# Altium PCB Copy of SoM.PcbDoc (part 3 of 8)
Units mm, origin at the board's own origin, x right, y up, seen from the top; angles counter-clockwise.
Board outline 69.6 x 50 mm, 10 copper layers ([1] Signal HS-H, [2] GND, [3] Signal HS-V, [4] Signal H, [5] GND, [6] POWER, [7] Signal V, [8] Signal HS-H, [9] GND, [10] Signal HS-V), stack 1.146 mm thick; 537 components, 516 nets, 5689 pads, 981 vias.
Unrouted connection lines stored in the file: 963.
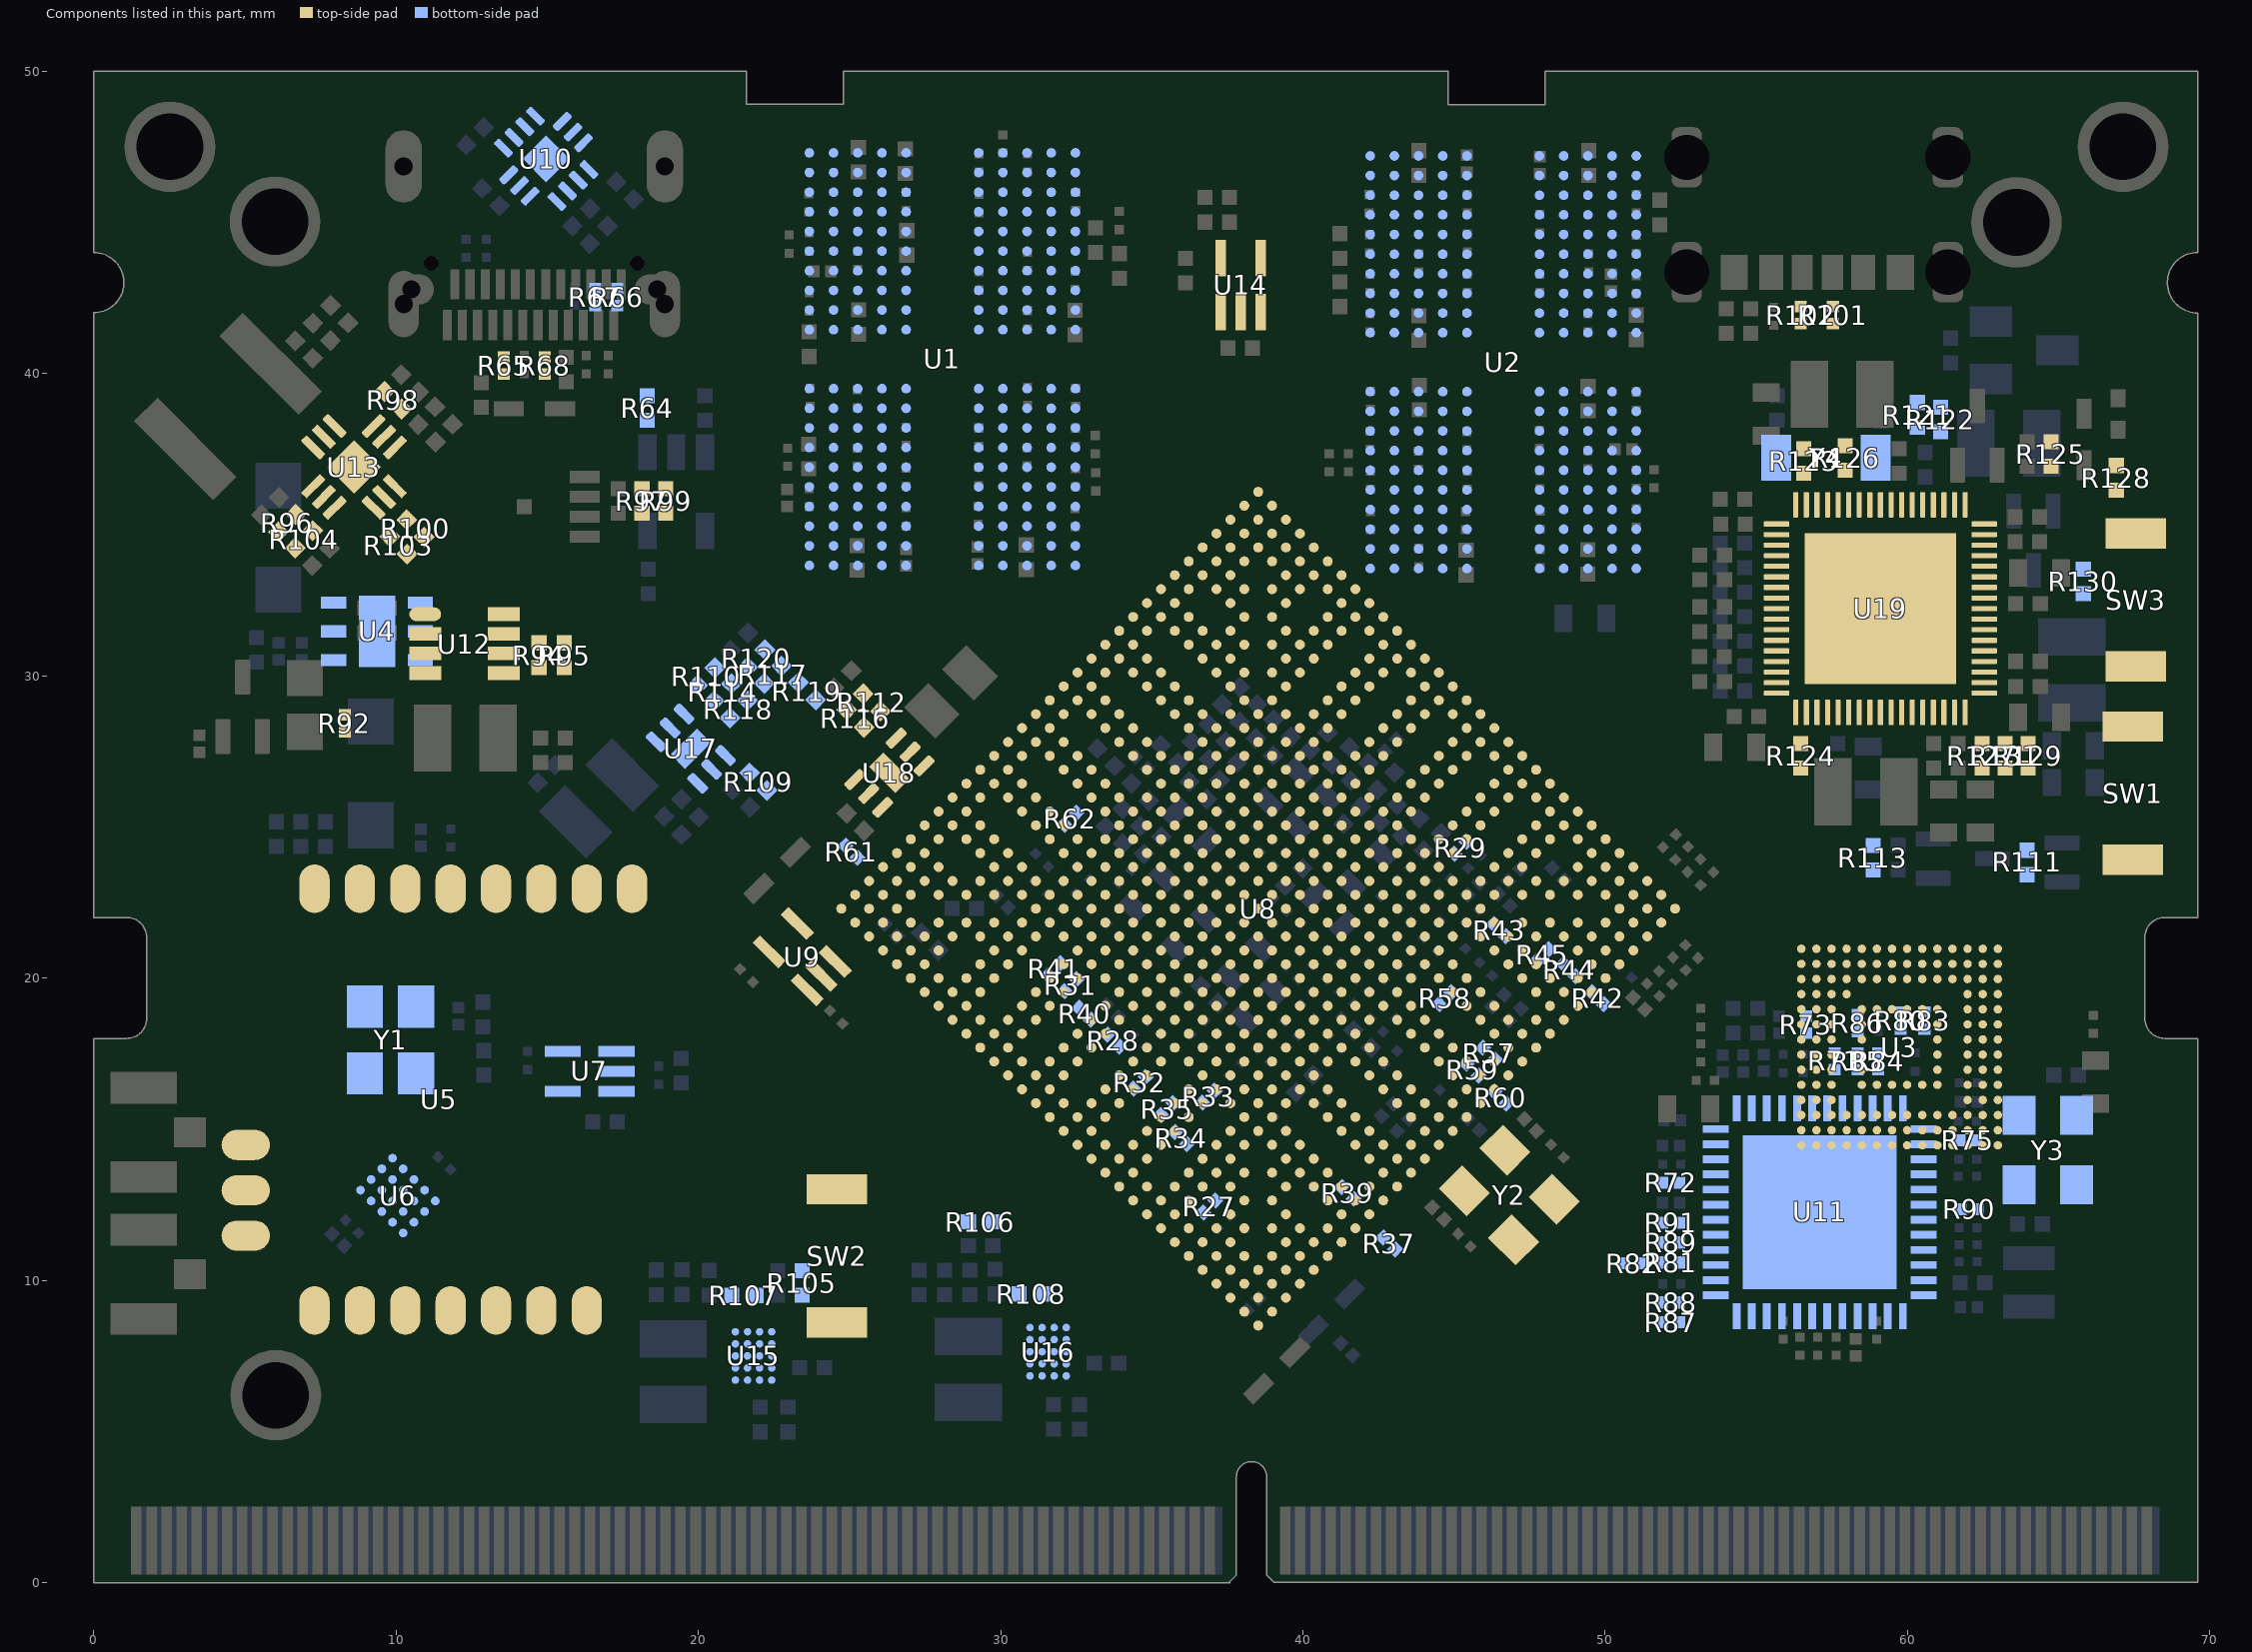
[diagram p8: the components of this part, seen from the top]

## Part data (continued)
R27: library part RES_100R-0.05W-1%-0201, "100 kOhms ±1% 0.05W, 1/20W Chip Resistor 0201 (0603 Metric) Automotive AEC-Q200 Thick Film", Case/Package=0201, Manufacturer="Panasonic Electronic Components", Manufacturer Part Number=ERJ-1GNF1003C, Supplier-1=Digikey
R28: library part RES_1.62K-0.05W-1%-0201, "1.62 kOhms ±1% 0.05W, 1/20W Chip Resistor 0201 (0603 Metric) Automotive AEC-Q200 Thick Film", Case/Package=0201, Manufacturer="Panasonic Electronic Components", Manufacturer Part Number=ERJ-1GNF1621C, Supplier-1=Digikey
R29: library part RES_6.04K-0.05W-1%-0201, "6.04 kOhms ±1% 0.05W, 1/20W Chip Resistor 0201 (0603 Metric) Thick Film", Case/Package=0201, Manufacturer="Panasonic Electronic Components", Manufacturer Part Number=ERJ-1GEF6041C, Supplier-1=Digikey
R31 R40 R41: library part RES_4.02K-0.05W-1%-0201, "4.02 kOhms ±1% 0.05W, 1/20W Chip Resistor 0201 (0603 Metric) Thick Film", Case/Package=0201, Manufacturer=Yageo, Manufacturer Part Number=RC0201FR-074K02L, Supplier-1=Digikey
R32 R33 R34 R35: library part RES_499R-0.05W-1%-0201, "499 Ohms ±1% 0.05W, 1/20W Chip Resistor 0201 (0603 Metric) Thick Film", Case/Package=0201, Manufacturer="Stackpole Electronics Inc", Manufacturer Part Number=RMCF0201FT499R, Supplier-1=Digikey
R37 R39: library part RES_133R-0.05W-1%-0201, "133 Ohms ±1% 0.05W, 1/20W Chip Resistor 0201 (0603 Metric) Automotive AEC-Q200 Thick Film", Case/Package=0201, Manufacturer="Panasonic Electronic Components", Manufacturer Part Number=ERJ-1GNF1330C, Supplier-1=Digikey
R42 R43 R44 R45 R57 R58 R59 R60 R61 R62: library part RES_2.2K-0.05W-1%-0201, "2.2 kOhms ±1% 0.05W, 1/20W Chip Resistor 0201 (0603 Metric) Thick Film", Case/Package=0201, Manufacturer="Stackpole Electronics Inc", Manufacturer Part Number=RMCF0201FT2K20, Supplier-1=Digikey
R64: library part RES_3.4K-0.1W-1%-0402, "3.4 kOhms ±1% 0.1W, 1/10W Chip Resistor 0402 (1005 Metric) Automotive AEC-Q200 Thick Film", Case/Package=0402, Manufacturer="Panasonic Electronic Components", Manufacturer Part Number=ERJ-2RKF3401X, Supplier-1=Digikey
R65 R66: library part RES_2M-0.05W-1%-0201, "2 MOhms ±1% 0.05W, 1/20W Chip Resistor 0201 (0603 Metric) Thick Film", Case/Package=0201, Manufacturer=Yageo, Manufacturer Part Number=RC0201FR-072ML, Supplier-1=Digikey
R67 R68: library part RES_100K-0.05W-1%-0201, "100 kOhms ±1% 0.05W, 1/20W Chip Resistor 0201 (0603 Metric) Automotive AEC-Q200 Thick Film", Case/Package=0201, Manufacturer="Panasonic Electronic Components", Manufacturer Part Number=ERJ-1GNF1003C, Supplier-1=Digikey
R71 R72 R73 R80 R81 R82 R83 R84 R85 R86 R87 R88 R89 R91 R92: library part RES_4.7K-0.1W-1%-0201, "4.02 kOhms ±1% 0.05W, 1/20W Chip Resistor 0201 (0603 Metric) Thick Film", Case/Package=0201, Manufacturer=Yageo, Manufacturer Part Number=RC0201FR-074K02L, Supplier-1=Digikey
R75: library part RES_2.49K-0.05W-1%-0201, "2.49 kOhms ±1% 0.05W, 1/20W Chip Resistor 0201 (0603 Metric) Automotive AEC-Q200 Thick Film", Case/Package=0201, Manufacturer="Panasonic Electronic Components", Manufacturer Part Number=ERJ-1GNF2491C, Supplier-1=Digikey
R90: library part RES_1.1K-0.05W-1%-0201, "1.1 kOhms ±1% 0.05W, 1/20W Chip Resistor 0201 (0603 Metric) Automotive AEC-Q200 Thick Film", Case/Package=0201, Manufacturer="Panasonic Electronic Components", Manufacturer Part Number=ERJ-1GNF1101C, Supplier-1=Digikey
R94: library part RES_30K-0.1W-1%-0402, "30 kOhms ±1% 0.1W, 1/10W Chip Resistor 0402 (1005 Metric) Automotive AEC-Q200, Moisture Resistant Thick Film", Case/Package=0402, Manufacturer="KOA Speer Electronics, Inc.", Manufacturer Part Number=RK73H1ETTP3002F, Supplier-1=Digikey
R95: library part RES_6.8K-0.1W-1%-0402, "6.8 kOhms ±1% 0.1W, 1/10W Chip Resistor 0402 (1005 Metric) Anti-Sulfur Thin Film", Case/Package=0402, Manufacturer="Vishay Beyschlag/Draloric/BC Components", Manufacturer Part Number=MCS04020C6801FE000, Supplier-1=Digikey
R96: library part RES_3.3R-0.1W-1%-0402, "3.3 Ohms ±1% 0.1W, 1/10W Chip Resistor 0402 (1005 Metric) Anti-Sulfur, Automotive AEC-Q200 Thick Film", Case/Package=0402, Manufacturer="Panasonic Electronic Components", Manufacturer Part Number=ERJ-U02F3R30X, Supplier-1=Digikey
R97 R98 R104 R110 R111 R112 R130: library part RES_100K-0.1W-1%-0402, "100 kOhms ±1% 0.1W, 1/10W Chip Resistor 0402 (1005 Metric) Anti-Sulfur Thin Film", Case/Package=0402, Manufacturer="Vishay Beyschlag/Draloric/BC Components", Manufacturer Part Number=MCS04020C1003FE000, Supplier-1=Digikey
R99 R114 R116 R121: library part RES_200K-0.1W-1%-0402, "200 kOhms ±1% 0.1W, 1/10W Chip Resistor 0402 (1005 Metric) Automotive AEC-Q200 Thick Film", Case/Package=0402, Manufacturer="Panasonic Electronic Components", Manufacturer Part Number=ERJ-2RKF2003X, Supplier-1=Digikey
R100 R103 R105 R106 R109 R113 R124 R125 R126: library part RES_10K-0.1W-1%-0402, "10 kOhms ±1% 0.1W, 1/10W Chip Resistor 0402 (1005 Metric) Anti-Sulfur Thin Film", Case/Package=0402, Manufacturer="Vishay Beyschlag/Draloric/BC Components", Manufacturer Part Number=MCS04020C1002FE000, Supplier-1=Digikey
R101 R102: library part RES_5.6K-0.05W-1%-0201, "5.6 kOhms ±1% 0.05W, 1/20W Chip Resistor 0201 (0603 Metric) Automotive AEC-Q200 Thick Film", Case/Package=0201, Manufacturer="Panasonic Electronic Components", Manufacturer Part Number=ERJ-1GNF5601C, Supplier-1=Digikey
R107 R108 R127 R128: library part RES_100R-0.1W-1%-0402, "100 Ohms ±1% 0.1W, 1/10W Chip Resistor 0402 (1005 Metric) Automotive AEC-Q200, Moisture Resistant Thick Film", Case/Package=0402, Manufacturer="KOA Speer Electronics, Inc.", Manufacturer Part Number=RK73H1ETTP1000F, Supplier-1=Digikey
R117: library part RES_39K-0.1W-1%-0402, "39 kOhms ±1% 0.1W, 1/10W Chip Resistor 0402 (1005 Metric) Automotive AEC-Q200, Moisture Resistant Thick Film", Case/Package=0402, Manufacturer="KOA Speer Electronics, Inc.", Manufacturer Part Number=RK73H1ETTP3902F, Supplier-1=Digikey
R118: library part RES_118K-0.1W-1%-0402, "118 kOhms ±1% 0.1W, 1/10W Chip Resistor 0402 (1005 Metric) Automotive AEC-Q200, Moisture Resistant Thick Film", Case/Package=0402, Manuafcturer Part Number=RK73H1ETTP1183F, Manufacturer="KOA Speer Electronics, Inc.", Supplier-1=Digikey
R119: library part RES_5.6K-0.1W-1%-0402, "5.6 kOhms ±1% 0.1W, 1/10W Chip Resistor 0402 (1005 Metric) Automotive AEC-Q200, Moisture Resistant Thick Film", Case/Package=0402, Manufacturer="KOA Speer Electronics, Inc.", Manufacturer Part Number=RK73H1ETTP5601F, Supplier-1=Digikey
R120: library part RES_12K-0.1W-1%-0402, "12 kOhms ±1% 0.1W, 1/10W Chip Resistor 0402 (1005 Metric) Anti-Sulfur Thin Film", Case/Package=0402, Manufacturer="Vishay Beyschlag/Draloric/BC Components", Manufacturer Part Number=MCS04020C1202FE000, Supplier-1=Digikey
R122: library part RES_51K-0.1W-1%-0402, "51 kOhms ±1% 0.1W, 1/10W Chip Resistor 0402 (1005 Metric) Automotive AEC-Q200 Thick Film", Case/Package=0402, Manufacturer="Panasonic Electronic Components", Manufacturer Part Number=ERJ-2RKF5102X, Supplier-1=Digikey
R123: library part RES_0.1R-0.1W-1%-0402, "100 mOhms ±1% 0.1W, 1/10W Chip Resistor 0402 (1005 Metric) Current Sense, Moisture Resistant Thick Film", Casse/Package=0402, Manufacturer="Samsung Electro-Mechanics", Manufacturer Part Number=RUT1005FR100CS, Supplier-1=Digikey
R129 R131: library part RES_300K-0.1W-1%-0402, "300 kOhms ±1% 0.1W, 1/10W Chip Resistor 0402 (1005 Metric) Automotive AEC-Q200 Thick Film", Case/Package=0402, Manufacturer="Panasonic Electronic Components", Manufacturer Part Number=ERJ-2RKF3003X, Supplier-1=Digikey
SW1 SW2 SW3: library part SW1_4982, "Tactile Switch 3x4x2mm SMD 2-Pin", Case/Package=SMD, Manufacturer=NA, Manufacturer Part Number=NA, Supplier-1=Sunrom
U1 U2: library part IC_RS512M32LZ4D2ANP-75BT, "LPDDR4/4X Package FBGA 200b Density 4Gbit~64Gbit Operating Temperature Range：-25~85℃ Speed：2667Mbps/3200Mbps/3733Mbps Voltage：VDD1/VDD2/VDDQ= 1.8 / 1.1 / 1.1 V（LPDDR4）VDD1/VDD2/VDDQ = 1.8 / 1.1 / 0.6 V（LPDDR4X）Approved Verification Platform：MTK、Spreadtrum", Case/Package="FBGA 200b", Manufacturer=RAYSON, Manufacturer Part Number=RS512M32LZ4D2ANP-75BT, Supplier-1=RAYSON
U3: library part IC_KLMAG2WEMB-B031, "16GB NAND Flash Memory", Case/Package=153-FBGA, Manufacturer="Samsung Electronics", Manufacturer Part Number=KLMAG2WEMB-B031, Supplier-1=NA
U4: library part REG_5.5V-0~5.1V-0.5A-2.55W-DFN-6, "Adjustable 5.5V 0.8V 500mA DFN-6 Linear Voltage Regulators RoHS", Alternate Part Number-1=NA, Case/Package=DFN-6, Manufacturer=STMicroelectronics, Supplier Part Number-1=C222094, Category=Regulators, Manufacturer Part Number=LD39050PUR, Number of Pins=6, Supplier-1=LCSC
U5: library part MOD_WF60-SMD, "Amp’ed RF Tech presents the WF60 WiFi dual / band module: 802.11abgn.", Alternate Part Number-1=NA, Case/Package=SMD, Manufacturer=Amp’ed, Category=Module, Manufacturer Part Number=WF60, Number of Pins=16, Supplier Part Number-1=WF60, Supplier-1=Arrow
U6: library part IC_TXB0108NMER, "Translation - Voltage Levels 8-Bit Bidirectional Voltage-Level Shifter with Auto Direction Sensing and +/-15-kV ESD Protect", Case/Package=NFBGA-20, Manufacturer="Texas Instruments", Manufacturer Part Number=TXB0108NMER, Supplier-1=Mouser
U7 U9: library part REG_1.8V-300mA-5.5V-SC70-5, "Linear Voltage Regulator IC 1 Output 300mA SC-70-5", Case/Package=SC70-5, Manufacturer="Richtek USA Inc.", Manufacturer Part Number=RT9193-18GU5, Supplier-1=Digikey
U8: library part IC_RK3399-FCBGA828, "RK3399 is a low power, high performance processor for computing, personal mobile.", Case/Package=FCBGA828, Manufacturer=Rockchip, Manufacturer Part Number=RK3399, Supplier-1=Rockchip
U10: library part IC_FUSB302MPX, "USB Controller USB 3.1 USB Interface 14-MLP (2.5x2.5)", Case/Package=14-MLP, Manufacturer="ON Semiconductor", Manufacturer Part Number=FUSB302MPX, Supplier-1=Digikey
U11: library part IC_RTL8211E-VB-CG, "Ethernet Transceivers 10/100/1000 Base-T PHY GMII, MII, RGMII 1.43V ~ 3.63V QFN-48_6x6x04P Ethernet ICs RoHS", Case/Package=QFN-48, Manufacturer="Realtek Semicon", Manufacturer Part Number=RTL8211E-VB-CG, Supplier-1=LCSC
U12: library part REG_0.6~5V-5.5V-3A-TSOT-23-8, "Switching Voltage Regulators 3A, 5.5V, 1.2MHz Sync Stp-Dwn Swtchr", Case/Package=TSOT-23-8, Manufacturer="Monolithic Power Systems (MPS)", Manufacturer Part Number=MP2143DJ-LF-Z, Supplier-1=Mouser
U13: library part REG_3.3V-26V-8A-QFN-12, "Switching Voltage Regulators 26V Fixed 3.3 V-8A Sync Buck Converter", Case/Package=QFN-12, Manufacturer="Monolithic Power Systems (MPS)", Manufacturer Part Number=NB680GD-Z, Supplier-1=Mouser
U14: library part REG_3.3V-5.5V-300mA-SC-70-5, "SC-70-5 Dropout Regulators(LDO) RoHS", Case/Package=SC-70-5, Manufacturer="Richtek Tech", Manufacturer Part Number=RT9193-33PU5, Supplier-1=LCSC
U15 U16: library part IC_SYR838PKC, "Step-Down Positive Programmable 1 6A 2.4MHz CSP1.56*1.96-20 DC-DC Converters RoHS", Case/Package=CSP1.56*1.96-20, Manufacturer="Silergy Corp", Manufacturer Part Number=SYR838PKC, Supplier-1=LCSC
U17 U18: library part REG-ADJ_5.5V-5.5V-1A-6-WDFN, "Buck Switching Regulator IC Positive Adjustable 0.6V 1 Output 1A 6-WDFN Exposed Pad", Case/Package=6-WDFN, Manufacturer="Richtek USA Inc.", Manufacturer Part Number=RT8010GQW, Supplier-1=Digikey
U19: library part IC_RK808-D-QFN68, "The RK808 is a complete power supply solution for Portable systems.", Case/Package=QFN68, Manufacturer=Rockchip, Manufacturer Part Number=RK808-D, Supplier-1=Rockchip
Y1: library part XTAL_ECS-327MVATX-2-CN-TR, "32.768kHz XO (Standard) CMOS Oscillator 1.6V ~ 3.6V Enable/Disable 4-SMD, No Lead", Alternate Part Number-1=NA, Case/Package=SMD-4, Manufacturer="ECS INC", Category=Crystal, Manufacturer Part Number=ECS-327MVATX-3-CN-TR, Number of Pins=4, Supplier Part Number-1=ECS-327MVATX-3-CN-TR, Supplier-1=Digikey
Y2 Y3: library part XTAL_24Mhz-12pF-4-SMD, "24MHz ±20ppm Crystal 12pF 50 Ohms 4-SMD, No Lead", Case/Package=SMD, Manufacturer="Abracon LLC", Manufacturer Part Number=ABM8AIG-24.000MHZ-12-2Z-T3, Supplier-1=Digikey
Y4: library part XTAL_32.768Khz-22pF-SMD, "32.768kHz ±20ppm Crystal 12pF 80 kOhms 2-SMD, No Lead", Case/Package=0603, Manufacturer=Ecliptek, Manufacturer Part Number=ECS-.327-6-34RR-TR, Supplier-1=Digikey